# Altium PCB PCB1.PcbDoc
Units mm, origin at the board's own origin, x right, y up, seen from the top; angles counter-clockwise.
Board outline 46.86 x 76.45 mm, 2 copper layers (Top Layer, Bottom Layer); 5 components, 9 nets, 55 pads, 7 vias.
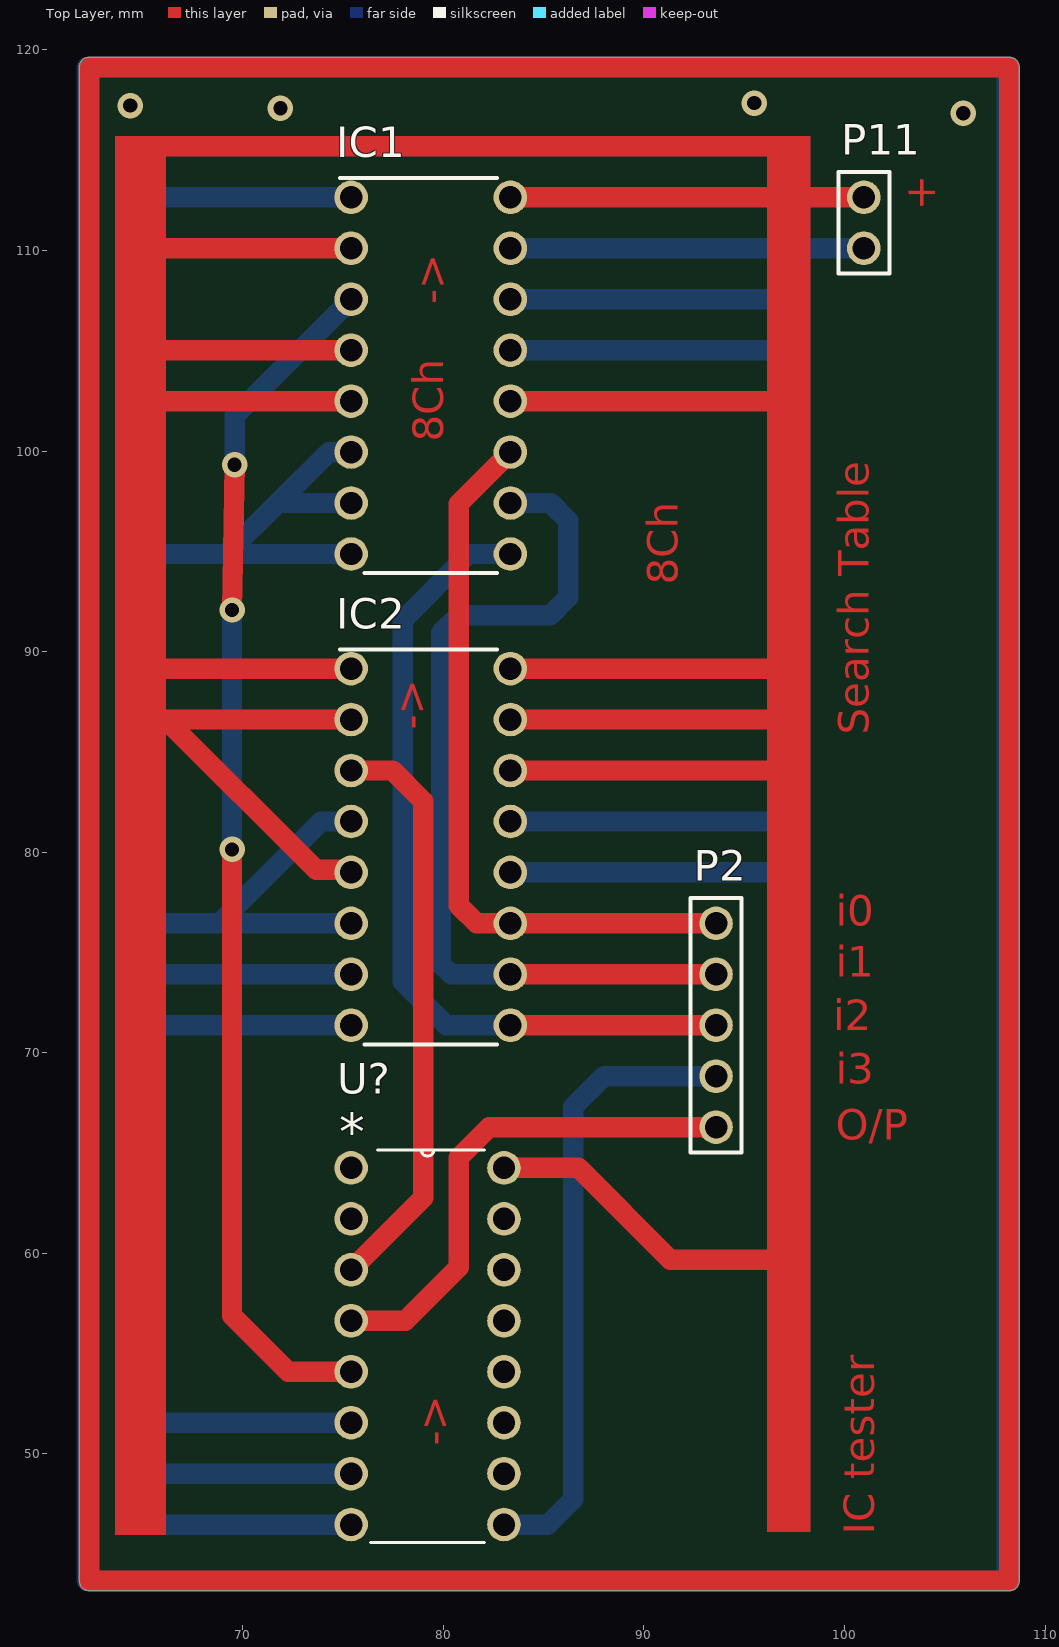
[diagram p0: Top Layer view]
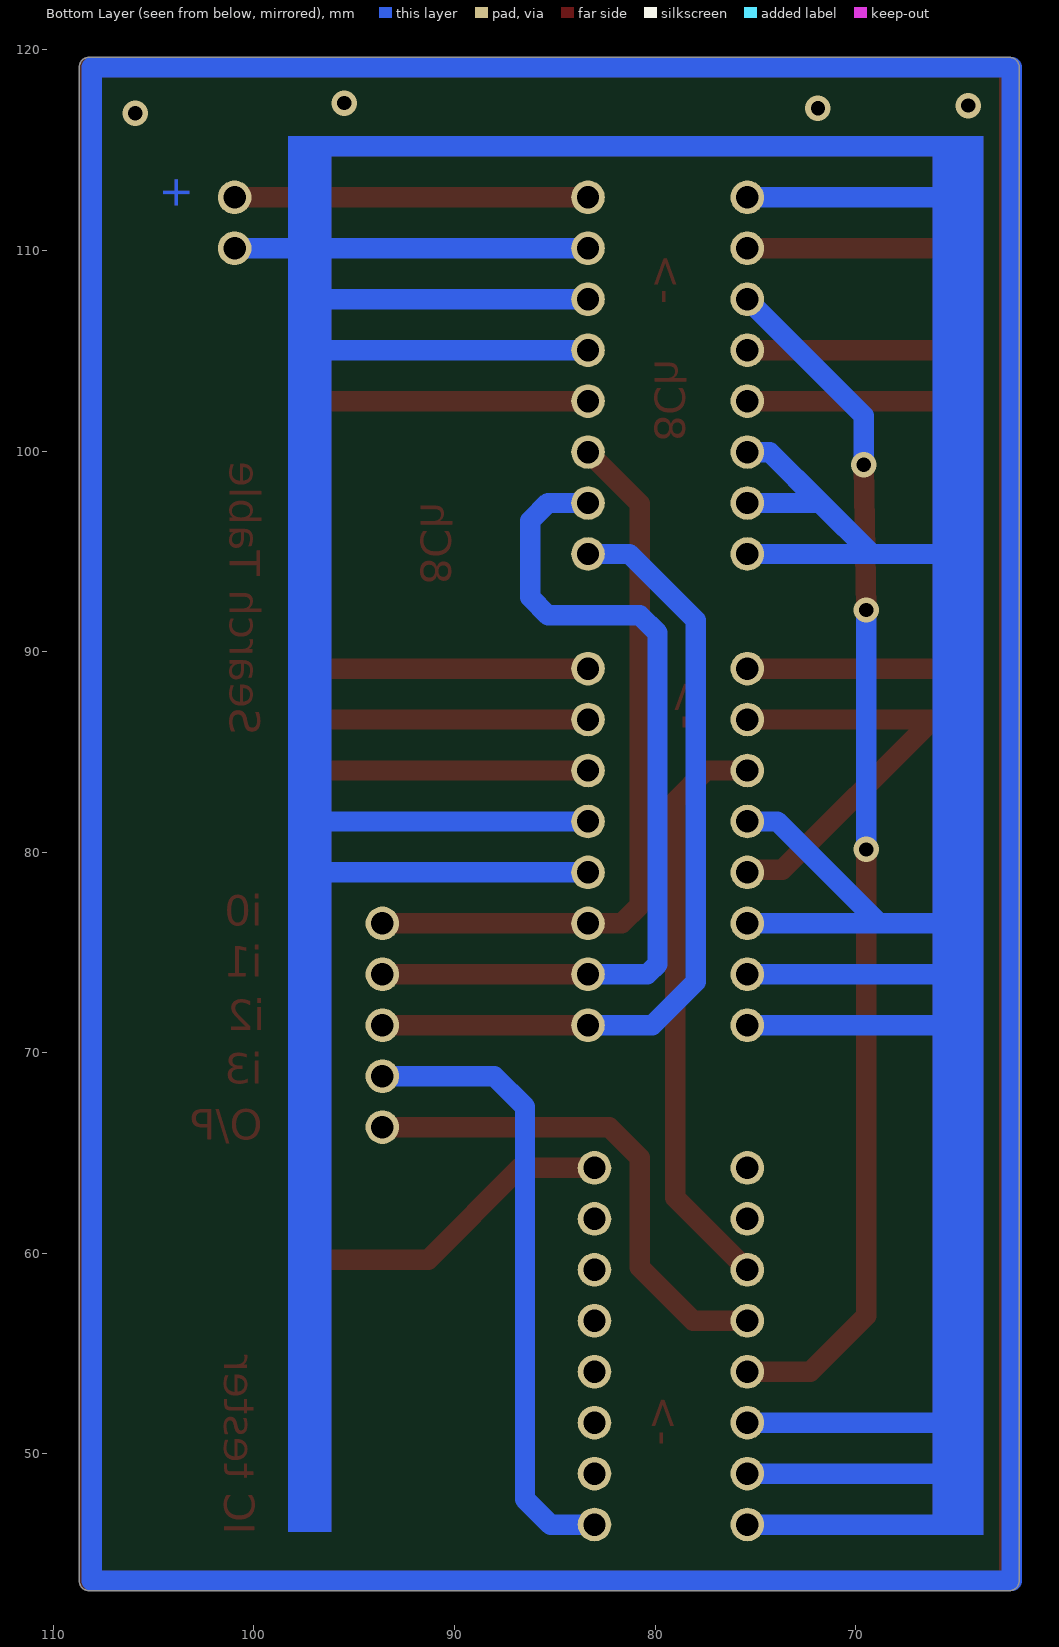
[diagram p1: Bottom Layer view, seen from below]

## Layer stack, top to bottom
Top Solder: solder mask 0.0102, Solder Resist, Dk 3.5
Top Layer: signal copper 0.0356
Dielectric 1: dielectric 0.32, FR-4, Dk 4.8
Bottom Layer: signal copper 0.0356
Bottom Solder: solder mask 0.0102, Solder Resist, Dk 3.5

## Board outline
61.849,43.688 61.849,118.999 cw(c62.357,118.999) 61.853,119.062 cw(c62.357,119.126) 62.357,119.634 108.204,119.634 cw(c108.204,119.126) 108.712,119.126 108.712,43.688 cw(c108.204,43.688) 108.204,43.18 62.357,43.18 cw(c62.357,43.688)

## Design rules (kind name [scope] priority, off if disabled: settings)
Clearance [All] p1: gap=0.254 ignorepadtopadclearanceinfootprint=FALSE except(0: Arc-Hole Track-Hole SMDPad-Hole THPad-Hole Via-Hole Fill-Hole Poly-Hole Region-Hole Text-Hole)
PolygonConnect [All] p1: connectstyle=Relief reliefconductorwidth=0.254 reliefentries=4 polygonreliefangle="90 Angle" airgapwidth=0.254
RoutingVias [All] p1: holewidth=0.711 width=1.27 viastyle="Through Hole" minholewidth=0.711 minwidth=1.27 maxholewidth=0.711 maxwidth=1.27
SolderMaskExpansion [All] p1: expansion=0.102
Width [All] p1: maxlimit=1.016 minlimit=1.016 preferedwidth=1.016 minimp=50.000000 maximp=50.000000 favimp=50.000000
30 further rules are at their usual default settings.

## Components (designator, comment, footprint, x,y, rotation, side; value= is the part's Value field where it differs from the comment)
IC1 "CD74HCT4051EE4" DIP794W53P254L1930H508Q16N 79.375,103.759 r0 top
IC2 "CD74HCT4051EE4" DIP794W53P254L1930H508Q16N 79.375,80.264 r0 top
P2 "Header 5" HDR1X5 93.599,76.454 r270 top
P11 "Header 2" HDR1X2 100.965,112.649 r270 top
U? "MC14053BCPG" *DIP254P762X444-16 83.025,46.482 r0 top

## Footprints (in the part's own frame and the unit in brackets; to place one, negate y for a bottom-side part, rotate by r counter-clockwise, add the part's x,y. Pads: shape width x height; smd on the part's side, far side on the other; paste and mask are expansions set on the pad)
*DIP254P762X444-16 [mil]
  round 66 hole 44: 1(-300,700) 2(-300,600) 3(-300,500) 4(-300,400) 5(-300,300) 6(-300,200) 7(-300,100) 8(-300,0) 9(0,0) 10(0,100) 11(0,200) 12(0,300) 13(0,400) 14(0,500) 15(0,600) 16(0,700)
  silkscreen extent -262,-35 -38,735
DIP794W53P254L1930H508Q16N [mil]
  round 66 hole 44: 1(-156.3,350) 2(-156.3,250) 3(-156.3,150) 4(-156.3,50) 5(-156.3,-50) 6(-156.3,-150) 7(-156.3,-250) 8(-156.3,-350) 9(156.3,-350) 10(156.3,-250) 11(156.3,-150) 12(156.3,-50) 13(156.3,50) 14(156.3,150) 15(156.3,250) 16(156.3,350)
  silkscreen extent -179,-388 130,388, body extent -162,-380 162,380, height 200
HDR1X2 [mil] "Connector; Header; 2 Position"
  round 66 hole 44: 1(0,0) 2(100,0)
  silkscreen extent -50,-50 150,50
HDR1X5 [mil] "Connector; Header; 5 Position"
  round 66 hole 44: 1(0,0) 2(100,0) 3(200,0) 4(300,0) 5(400,0)
  silkscreen extent -50,-50 450,50

## Part data
IC1 IC2: "Integrated Circuit", Manufacturer_Name="Texas Instruments", Mouser Part Number=595-CD74HCT4051EE4, Datasheet Link=http://www.alldatasheet.com/datasheet-pdf/pdf/227332/TI/CD74HCT4051EE4.html, Height=5.08mm, Manufacturer_Part_Number=CD74HCT4051EE4, Mouser Price/Stock=https://www.mouser.com/Search/Refine.aspx?Keyword=595-CD74HCT4051EE4
P2: "Header, 5-Pin", LatestRevisionDate=17-Jul-2002, LatestRevisionNote="Re-released for DXP Platform.", Publisher="Altium Limited"
P11: "Header, 2-Pin", LatestRevisionDate=17-Jul-2002, LatestRevisionNote="Re-released for DXP Platform.", Publisher="Altium Limited"
U?: "Ic Mux/Demux Triple 2x1 16dip - Mc14053bcpg", Package="DIP-16 ON Semiconductor", Availability=Unavailable, MF="ON Semiconductor", MP=MC14053BCPG, Price=None, SnapEDA_Link=https://www.snapeda.com/parts/MC14053BCPG/ON%20Semiconductor/view-part/?ref=snap

## Via types
v1: diameter 1.27, hole 0.711, Top Layer to Bottom Layer, 7 vias

## Nets (pads, with @x,y where several pads share a name; then routed paths per layer and width w, separated by ;. In a path a pad name is that pad's centre, name@x,y a point inside that pad or via, vN(x,y) a via of type N, cw(c..) or ccw(c..) an arc to the next point about the centre after c; other vN are vias at no path point)
GND: IC1.1 IC1.6 IC1.7 IC1.8 IC1.13 IC1.14 IC1.15 IC2.4 IC2.6 IC2.7 IC2.8 IC2.12 IC2.13 P11.2 U?.6 U?.7 U?.8 | length 199
  Bottom Layer w1.016: 65.532,49.022 U?.7 ; 65.532,115.189 96.774,115.189 ; 65.659,71.374 IC2.8 ; 65.659,94.869 69.215,94.869 ; 65.659,112.649 IC1.1 ; 65.786,73.914 IC2.7 ; 65.913,46.482 U?.8 ; 66.04,51.562 U?.6 ; 66.167,76.454 68.834,76.454 ; IC2.6 68.834,76.454 ; IC2.4 73.914,81.534 68.834,76.454 ; IC1.8 69.215,94.869 ; IC1.7 71.755,97.409 ; IC1.6 74.295,99.949 71.755,97.409 ; IC2.12 96.52,78.994 ; IC2.13 96.647,81.534 ; IC1.13 97.028,105.029 ; IC1.14 97.155,107.569 ; IC1.15 96.647,110.109 ; 97.917,110.109 P11.2 ; 69.215,94.869 71.755,97.409
NetIC1_3: IC1.3 U?.5 | length 60.2
  Top Layer w1.016: v1(69.469,80.137) 69.469,56.896 72.263,54.102 U?.5 ; v1(69.469,92.075) v1(69.596,99.314)
  Bottom Layer w1.016: v1(69.469,80.137) v1(69.469,92.075) ; v1(69.596,99.314) 69.596,101.76 IC1.3
NetIC1_9: IC1.9 IC2.9 P2.3 | length 41.4
  Top Layer w1.016: IC2.9@83.185,71.374 IC2.9 P2.3
  Bottom Layer w1.016: IC2.9 80.137,71.374 77.978,73.533 77.978,91.567 81.28,94.869 IC1.9
NetIC1_10: IC1.10 IC2.10 P2.2 | length 44.9
  Top Layer w1.016: IC2.10@83.058,73.914 IC2.10 P2.2
  Bottom Layer w1.016: IC2.10 80.391,73.914 79.883,74.422 79.883,90.932 80.772,91.821 85.344,91.821 86.233,92.71 86.233,96.52 85.344,97.409 IC1.10
NetIC1_11: IC1.11 IC2.11 P2.1 | length 36.9
  Top Layer w1.016: IC1.11 80.772,97.376 80.772,77.343 81.661,76.454 IC2.11 P2.1
NetIC2_3: IC2.3 U?.3 | length 29.1
  Top Layer w1.016: U?.3 78.994,62.771 78.994,82.55 77.47,84.074 IC2.3
NetP2_4: P2.4 U?.9 | length 31.2
  Bottom Layer w1.016: U?.9 85.217,46.482 86.487,47.752 86.487,67.31 88.011,68.834 ; 88.138,68.834 P2.4
NetP2_5: P2.5 U?.4 | length 25.4
  Top Layer w1.016: U?.4 78.105,56.642 80.772,59.309 80.772,64.77 82.296,66.294 P2.5
VCC: IC1.2 IC1.4 IC1.5 IC1.12 IC1.16 IC2.1 IC2.2 IC2.5 IC2.14 IC2.15 IC2.16 P11.1 U?.16 | length 178.5
  Top Layer w1.016: 65.024,102.489 IC1.5 ; 65.532,86.614 66.675,86.614 ; 65.659,110.109 IC1.2 ; 65.786,89.154 IC2.1 ; 65.913,105.029 IC1.4 ; 65.913,115.189 96.52,115.189 ; IC2.5@74.93,79.121 73.66,79.121 66.167,86.614 66.675,86.614 ; IC2.2 66.675,86.614 ; U?.16 86.741,64.262 91.313,59.69 96.52,59.69 ; IC2.14 96.393,84.074 ; IC2.15 96.774,86.614 ; IC2.16 96.266,89.154 ; IC1.12 97.028,102.489 ; IC1.16 P11.1 ; 96.774,64.008 97.028,64.262
pads on no net: U?.1 U?.2 U?.10 U?.11 U?.12 U?.13 U?.14 U?.15
copper on no net: | length 484.9
  Top Layer w1.016: 62.357,118.999 62.357,43.688 108.204,43.688 108.204,119.126 62.357,119.126
  Bottom Layer w1.016: 62.23,118.999 62.23,43.688 108.077,43.688 108.077,119.126 62.23,119.126
  other v1: 105.918,116.84 71.882,117.094 64.389,117.221 95.504,117.348

## Other copper
Top Layer:
  rectangle net VCC: 63.627,45.974 66.167,115.697
  rectangle net VCC: 96.139,46.101 98.298,115.697
  text "+" at 104.521,112.014 h1.52 r90
  text "->" at 80.137,107.315 h1.52 r90
  text "8Ch" at 80.01,100.457 h1.52 r90
  text "8Ch" at 91.694,93.345 h1.52 r90
  text "->" at 79.121,86.106 h1.52 r90
  text "Search Table" at 101.219,85.852 h1.52 r90
  text "i0" at 99.568,76.327 h1.52
  text "i1" at 99.568,73.787 h1.52
  text "i2" at 99.441,71.12 h1.52
  text "i3" at 99.568,68.453 h1.52
  text "O/P" at 99.568,65.659 h1.52
  text "->" at 80.264,50.419 h1.52 r90
  text "IC tester" at 101.473,45.974 h1.52 r90
Bottom Layer:
  rectangle net GND: 96.139,46.101 98.298,115.697
  rectangle net GND: 63.627,45.974 66.167,115.697
  text "+" at 104.521,112.014 h1.52 r90

## Text inside footprints (layer, text, board x,y; h text height)
U?: Top Overlay "*" at 74.821,65.13 h1.88; Mechanical 4 "*" at 74.821,65.13 h1.88; Mechanical 4 "*" at 74.821,65.13 h1.88